# Altium PCB PCB2.PcbDoc
Units mm, origin at the board's own origin, x right, y up, seen from the top; angles counter-clockwise.
Board outline 152.4 x 101.6 mm, 2 copper layers (Top Layer, Bottom Layer); 1 components, 0 nets, 6 pads, 0 vias.
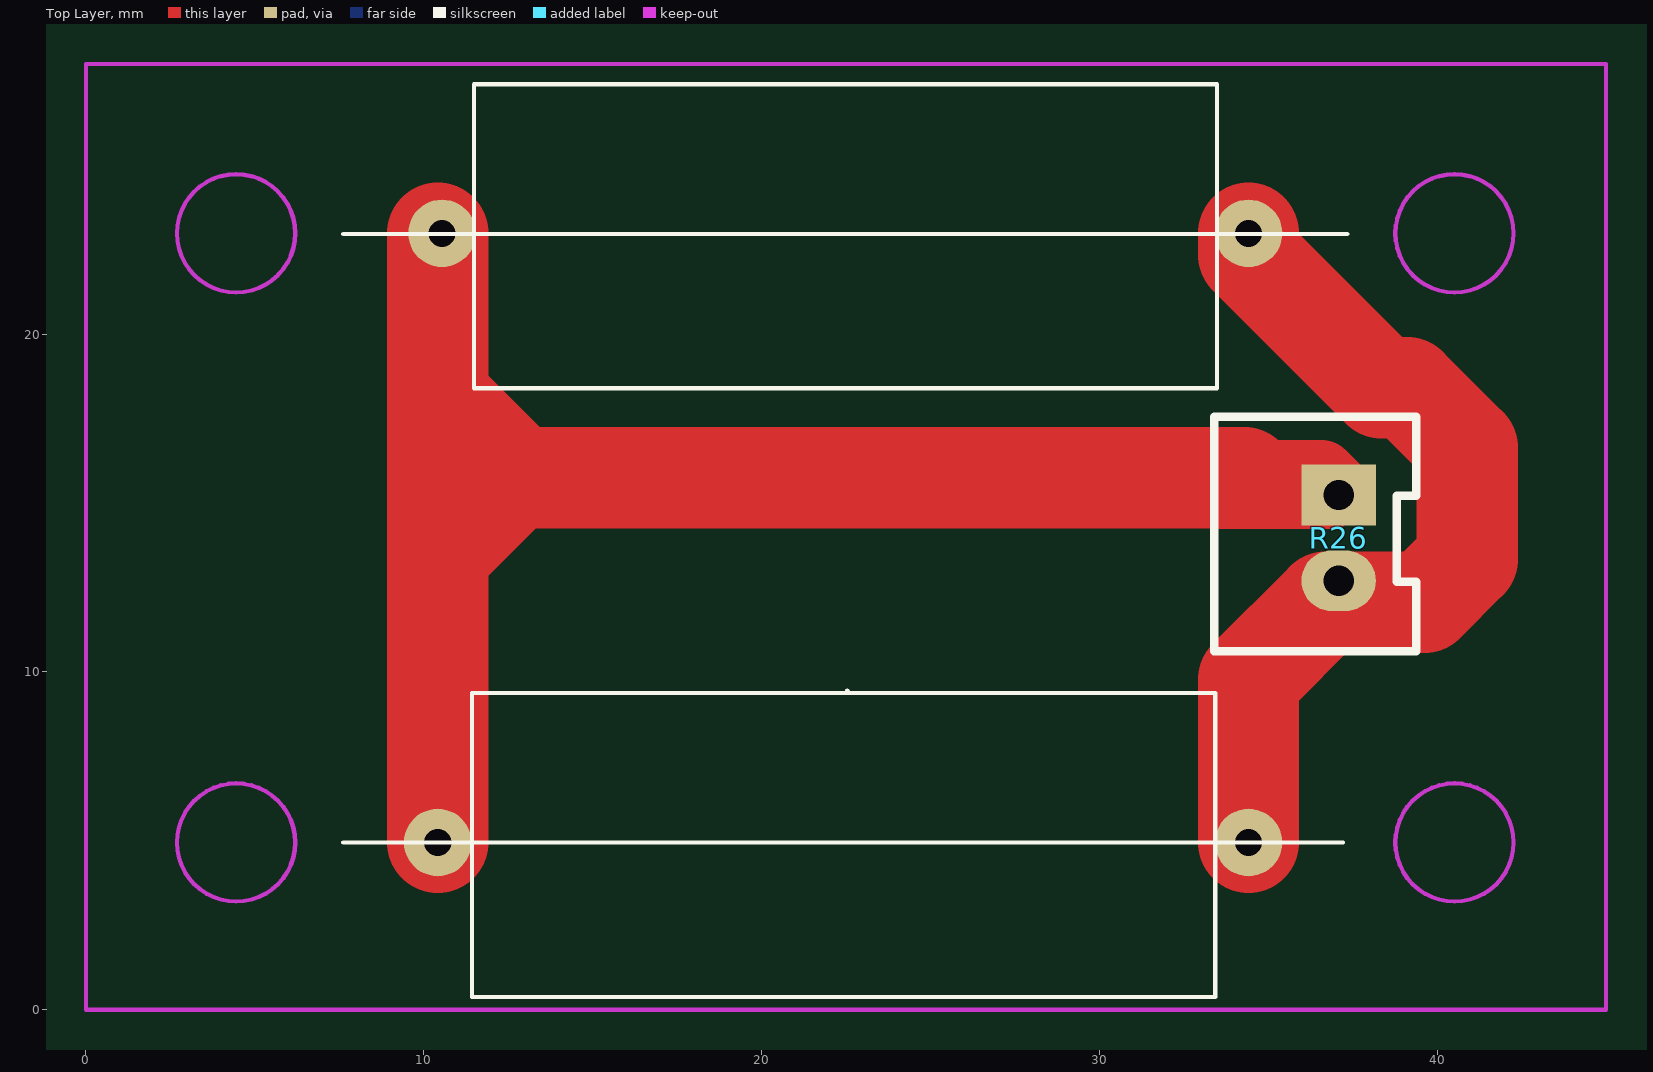
[diagram p0: Top Layer view]
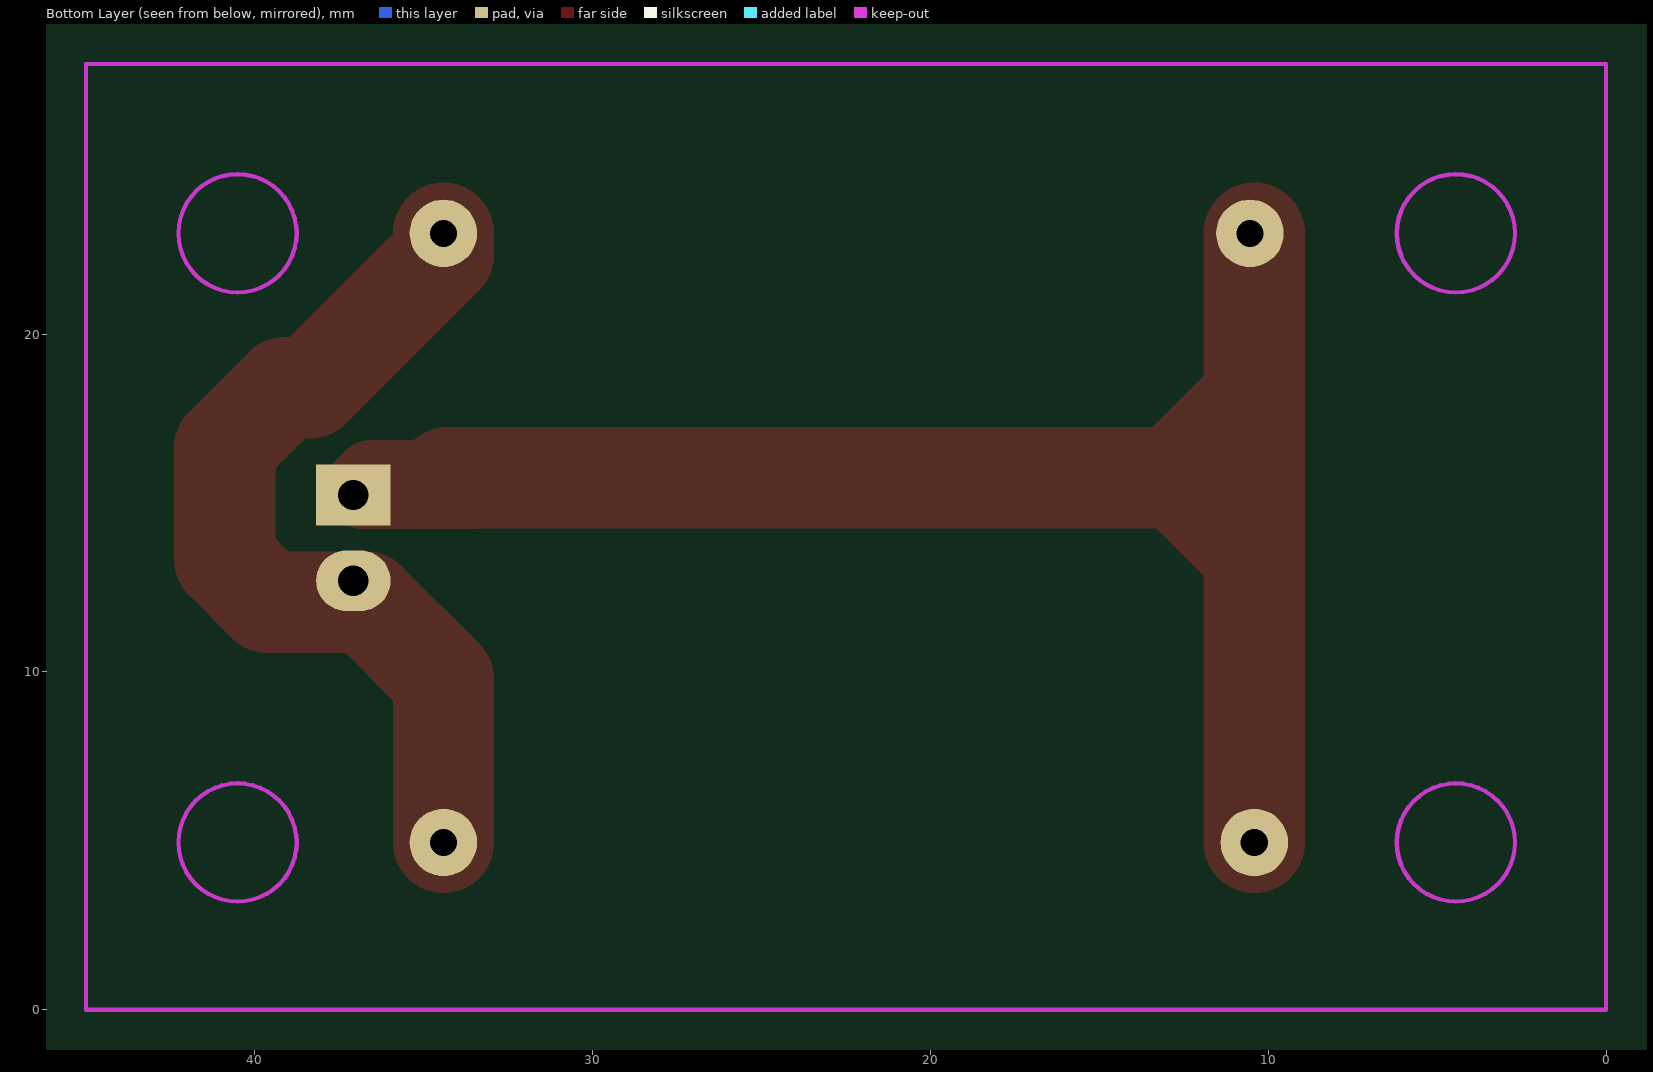
[diagram p1: Bottom Layer view, seen from below]

## Layer stack, top to bottom
Top Layer: signal copper 0.0356
Dielectric: dielectric 0.32, FR-4, Dk 4.8
Bottom Layer: signal copper 0.0356

## Board outline
-53.848,-53.975 98.552,-53.975 98.552,47.625 -53.848,47.625

## Design rules (kind name [scope] priority, off if disabled: settings)
Clearance [All] p1: gap=0.254
PolygonConnect [All] p1: connectstyle=Relief reliefconductorwidth=0.254 reliefentries=4 polygonreliefangle="90 Angle"
RoutingVias [All] p1: holewidth=0.711 width=1.27 viastyle="Through Hole" minholewidth=0.711 minwidth=1.27 maxholewidth=0.711 maxwidth=1.27
SilkscreenOverComponentPads [All] p1: minsilkscreentomaskgap=0.254
SolderMaskExpansion [All] p1: expansion=0.102
TestPointUsage [All] p1: valid=0 allowmultiple=FALSE
Testpoint [All] p1: side=15 testpointundercomponent=TRUE minsize=1.016 maxsize=2.54 preferedsize=1.524 minholesize=0 maxholesize=1.016 preferedholesize=0.813 testpointgrid=0.025 style=1023 order=0123456789
Width [All] p1: maxlimit=0.254 minlimit=0.254 preferedwidth=0.254
23 further rules are at their usual default settings.

## Components (designator, comment, footprint, x,y, rotation, side; value= is the part's Value field where it differs from the comment)
R26 "0R" 2PIN2.54 37.084,15.24 r270 top

## Footprints (in the part's own frame and the unit in brackets; to place one, negate y for a bottom-side part, rotate by r counter-clockwise, add the part's x,y. Pads: shape width x height; smd on the part's side, far side on the other; paste and mask are expansions set on the pad)
2PIN2.54 [mm]
  rect 1.8x2.2 hole 0.9: 1(0,0)
  oval 1.8x2.2 hole 0.9: 2(2.54,0)
  silkscreen extent -2.32,-3.69 4.63,2.3

## Free pads (board coordinates)
  round 2 hole 0.8: 1(10.414,4.953) 2(34.417,4.953) 3(34.417,22.987) 4(10.541,22.987)

## Nets (pads, with @x,y where several pads share a name; then routed paths per layer and width w, separated by ;. In a path a pad name is that pad's centre, name@x,y a point inside that pad or via, vN(x,y) a via of type N, cw(c..) or ccw(c..) an arc to the next point about the centre after c; other vN are vias at no path point)
pads on no net: R26.1 R26.2
copper on no net: | length 81.1
  Top Layer w2: 33.528,15.24 36.83,15.24 ; 33.655,15.875 36.576,15.875 36.957,15.494 36.957,15.367
  Top Layer w3: 10.414,4.953 10.414,22.987 ; 10.414,13.462 12.7,15.748 12.827,15.748 10.414,18.161 ; 10.414,15.748 34.29,15.748 ; 34.417,4.953 34.417,9.779 36.703,12.065 39.624,12.065 40.894,13.335 40.894,16.637 39.116,18.415 38.354,18.415 34.417,22.352 34.417,22.987

## Keep-outs
Keep-Out Layer:
  circle w0.127: c40.513,4.953 r1.75
  circle w0.127: c40.513,22.987 r1.75
  circle w0.127: c4.445,22.987 r1.75
  circle w0.127: c4.445,4.953 r1.75
  lines w0.127: 0,0 0,28 45,28 45,0 0,0

## Silkscreen, mask and mechanical layers (free items; w line width, h text height)
Top Overlay:
  lines w0.127: 7.62,4.953 37.211,4.953 ; 7.62,22.968 37.338,22.968 ; 22.534,9.453 22.606,9.381 ; 11.43,0.381 11.43,9.381 33.43,9.381 33.43,0.381 11.43,0.381 ; 11.485,18.396 33.485,18.396 33.485,27.396 11.485,27.396 11.485,18.396
Mechanical 1:
  lines w0.127: 36.83,12.192 36.83,14.732